# Altium PCB B_UN_C.PcbDoc
Units mm, origin at the board's own origin, x right, y up, seen from the top; angles counter-clockwise.
Board outline 110.11 x 90.04 mm, 2 copper layers (Top Layer, Bottom Layer); 66 components, 31 nets, 173 pads, 2 vias.
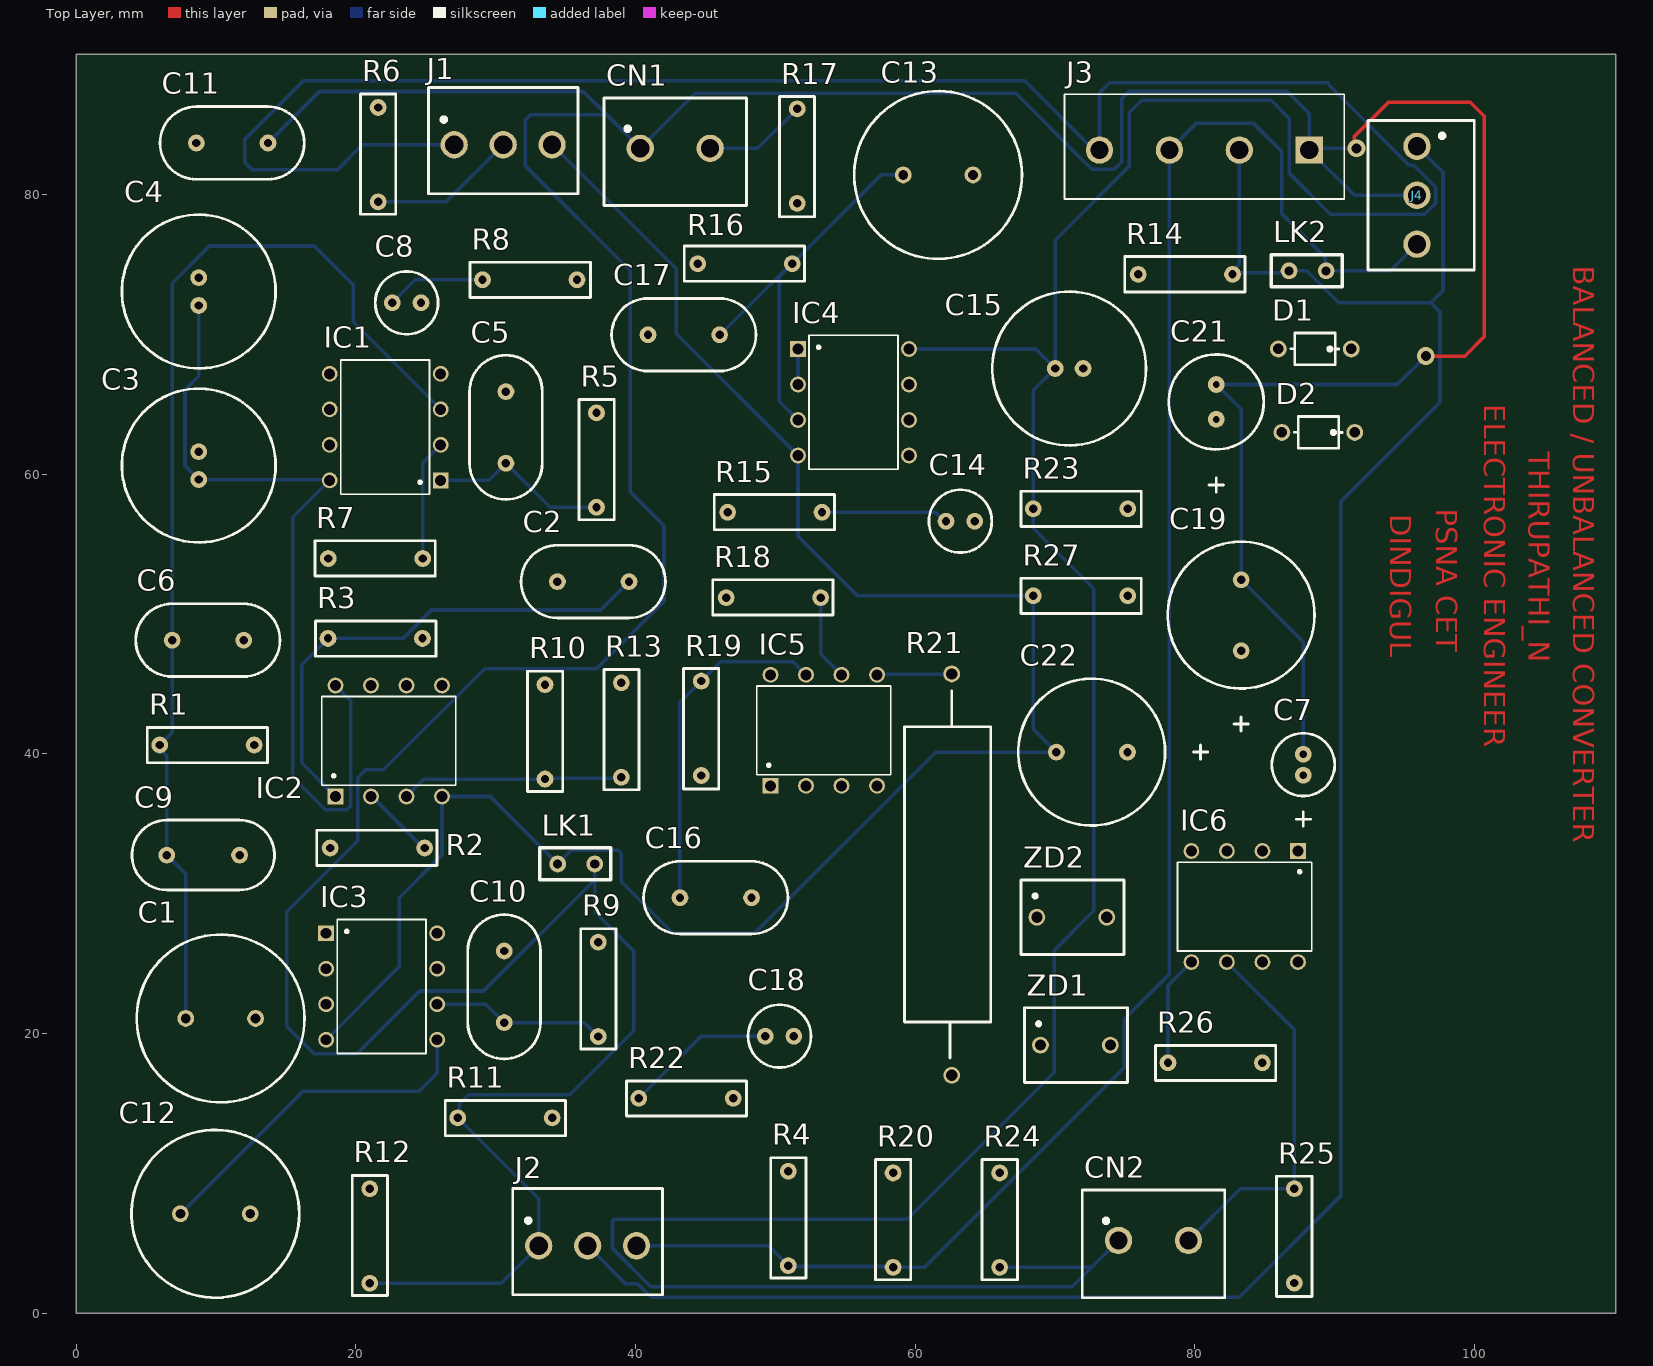
[diagram p0: Top Layer view]
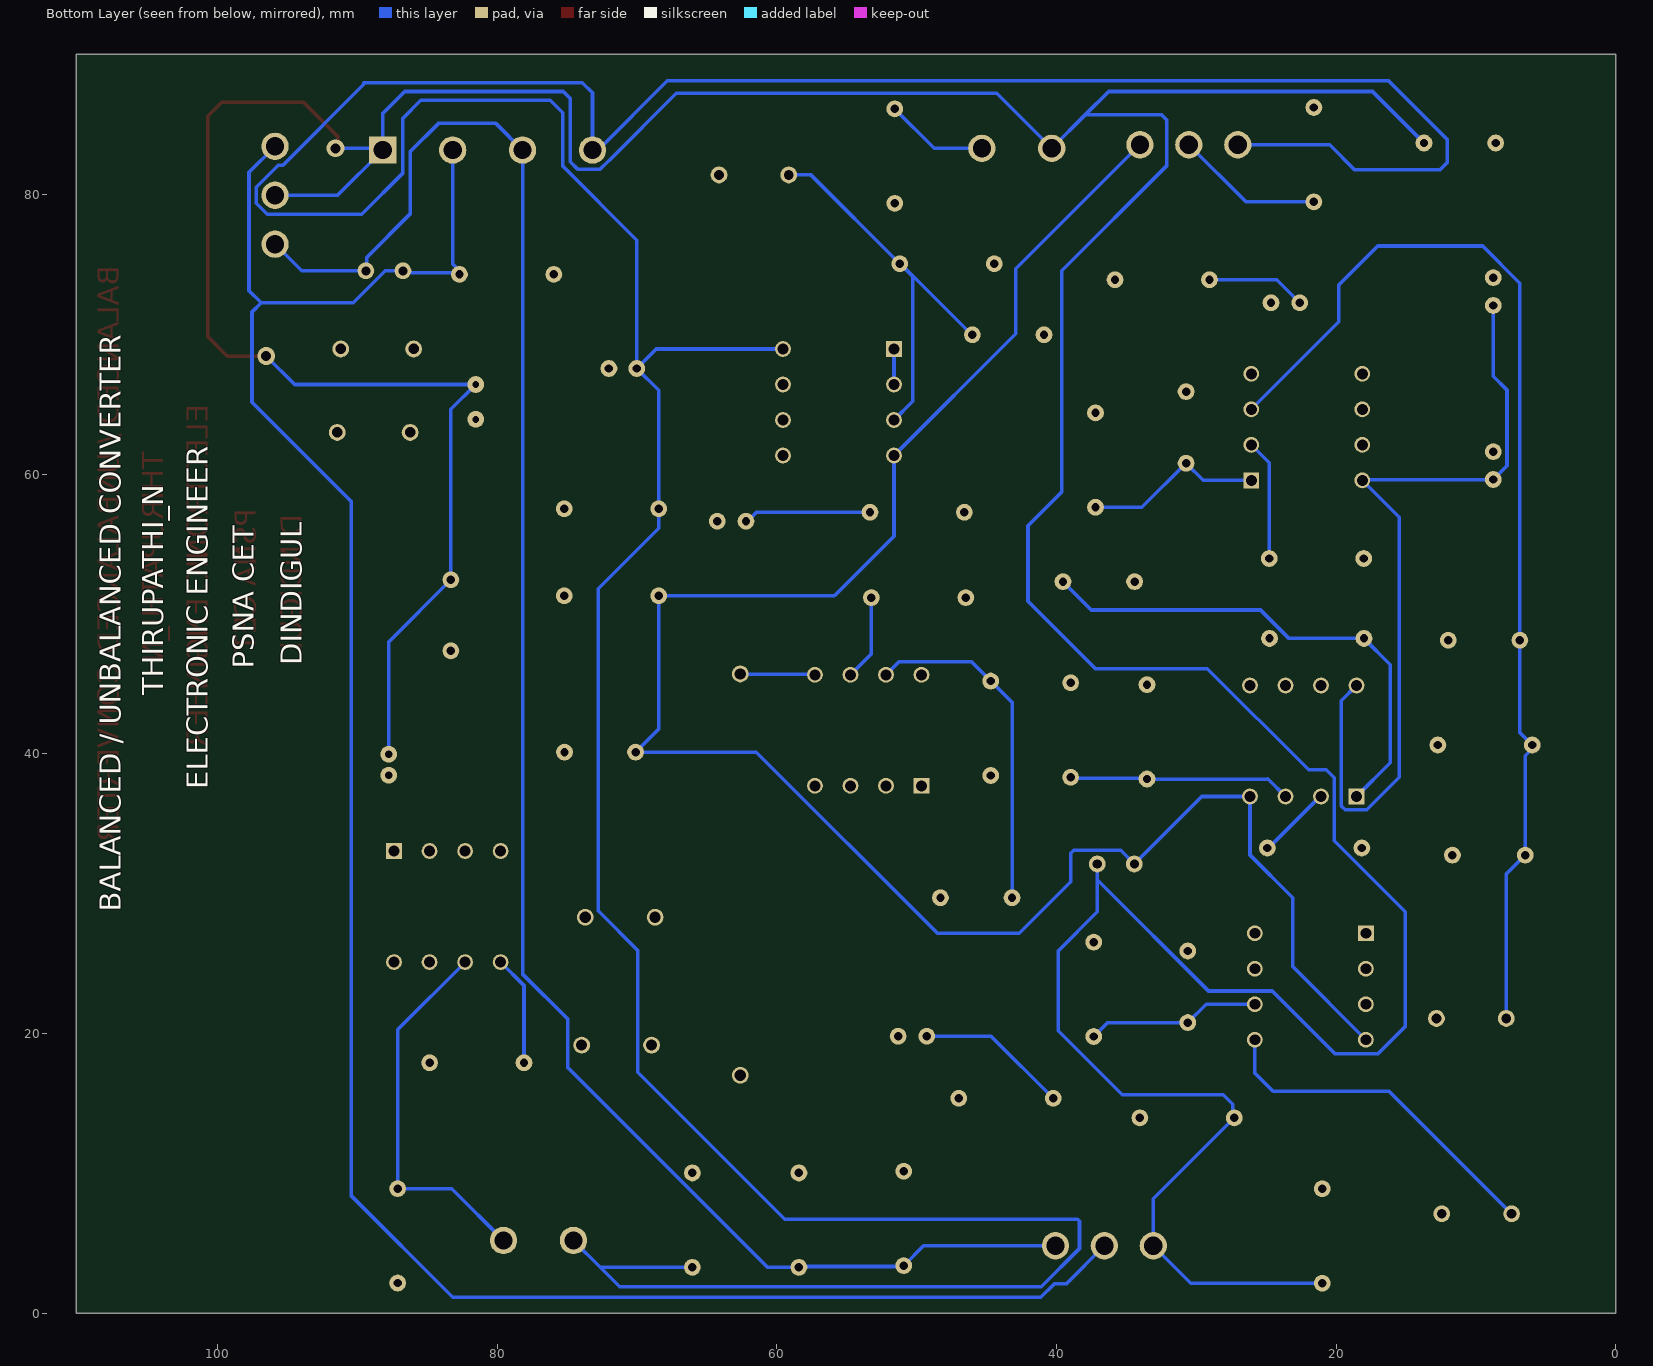
[diagram p1: Bottom Layer view, seen from below]

## Layer stack, top to bottom
Top Solder: solder mask 0.0102, Solder Resist, Dk 3.5
Top Layer: signal copper 0.0356
Dielectric 1: dielectric 0.32, FR-4, Dk 4.8
Bottom Layer: signal copper 0.0356
Bottom Solder: solder mask 0.0102, Solder Resist, Dk 3.5

## Board outline
0,0 0,90.043 110.109,90.043 110.109,0

## Design rules (kind name [scope] priority, off if disabled: settings)
Clearance [All] p1: gap=0.254 ignorepadtopadclearanceinfootprint=FALSE except(0: Arc-Hole Track-Hole SMDPad-Hole THPad-Hole Via-Hole Fill-Hole Poly-Hole Region-Hole Text-Hole)
MinimumSolderMaskSliver [All] p1: minsoldermaskwidth=0.096
PolygonConnect [All] p1: connectstyle=Relief reliefconductorwidth=0.254 reliefentries=4 polygonreliefangle="90 Angle" airgapwidth=0.254
RoutingVias [All] p1: holewidth=0.711 width=1.27 viastyle="Through Hole" minholewidth=0.711 minwidth=1.27 maxholewidth=0.711 maxwidth=1.27
SilkToSolderMaskClearance [IsPad] p1: minsilkscreentomaskgap=0.15 clearancetoexposedcopper=TRUE
SolderMaskExpansion [All] p1: expansion=0.102 istentingtop=FALSE
Width [All] p1: maxlimit=0.254 minlimit=0.254 preferedwidth=0.254
28 further rules are at their usual default settings.

## Components (designator, comment, footprint, x,y, rotation, side; value= is the part's Value field where it differs from the comment)
C1 "C_10uF" C_10UF 7.835,21.082 r0 top
C2 "C_100pF" C_100PF 39.537,52.324 r180 top
C3 "C_100nF" C_100NF 8.763,59.628 r90 top
C4 "C_100nF" C_100NF 8.763,72.074 r90 top
C5 "C_100pF" C_100PF 30.734,60.793 r90 top
C6 "C_100pF" C_100PF 6.858,48.133 r0 top
C7 "C_10uF_16V" C_10UF_16V 87.757,39.981 r270 top
C8 "C_22uF" C_22UF 22.733,72.263 r0 top
C9 "C_220pF" C_220PF 6.484,32.766 r0 top
C10 "C_100pF" C_100PF 30.607,20.788 r90 top
C11 "C_100pF" C_100PF 13.716,83.693 r180 top
C12 "C_10uF" C_10UF 7.454,7.112 r0 top
C13 "C_10uF" C_10UF 59.143,81.407 r0 top
C14 "C_22uF" C_22UF 62.335,56.642 r0 top
C15 "C_100nF" C_100NF 70.017,67.564 r0 top
C16 "C_100pF" C_100PF 43.18,29.718 r0 top
C17 "C_100pF" C_100PF 46.014,69.977 r180 top
C18 "C_22uF" C_22UF 49.403,19.812 r0 top
C19 "C_470uF_25V" C_25V_470UF 83.312,51.181 r270 top
C21 "C_100uF_16V" C_100UF_16V 81.534,66.421 r270 top
C22 "C_470uF_25V" C_25V_470UF 71.374,40.132 r0 top
CN1 "1 x 2_CON" 1*2_CONNECTOR 40.299,83.312 r0 top
CN2 "1 x 2_CON" 1*2_CONNECTOR 74.509,5.207 r0 top
D1 "D_1N4004" D_IN4004 91.189,68.961 r180 top
D2 "D_1N4004" D_IN4004 91.44,62.992 r180 top
IC1 "LM833P" IC_833 22.225,59.563 r180 top
IC2 "LM833P" IC_833 18.542,40.8 r90 top
IC3 "LM833P" IC_833 21.717,27.178 r0 top
IC4 "LM833P" IC_833 55.466,68.961 r0 top
IC5 "LM833P" IC_833 49.657,41.562 r90 top
IC6 "LM833P" IC_833 87.376,29.21 r270 top
J1 "1x3" 1*3_CONNECTOR 27.036,83.566 r0 top
J2 "1x3" 1*3_CONNECTOR 33.076,4.826 r0 top
J3 "1x4" 1*4_CONNECTOR 88.185,83.185 r180 top
J4 "1x3" 1*3_CONNECTOR 95.885,83.454 r270 top
LK1 "2__PINS" 2_PIN 34.434,32.131 r0 top
LK2 "2__PINS" 2_PIN 86.741,74.549 r0 top
R1 "R_10K" CF_RESISTOR_FP 6.096,40.64 r0 top
R2 "R_10K" CF_RESISTOR_FP 24.788,33.274 r180 top
R3 "R_10K" CF_RESISTOR_FP 18.138,48.26 r0 top
R4 "R_100K" CF_RESISTOR_FP 50.927,3.533 r90 top
R5 "R_10K" CF_RESISTOR_FP 37.211,57.762 r90 top
R6 "R_150" CF_RESISTOR_FP 21.59,79.606 r90 top
R7 "R_20K" CF_RESISTOR_FP 24.661,53.975 r180 top
R8 "R_100K" CF_RESISTOR_FP 29.187,73.914 r0 top
R9 "R_10K" CF_RESISTOR_FP 37.338,19.916 r90 top
R10 "R_10K" CF_RESISTOR_FP 33.528,38.331 r90 top
R11 "R_10K" CF_RESISTOR_FP 27.409,13.97 r0 top
R12 "R_100K" CF_RESISTOR_FP 20.995,2.275 r90 top
R13 "R_10K" CF_RESISTOR_FP 38.989,38.458 r90 top
R14 "R_150" CF_RESISTOR_FP 82.573,74.295 r180 top
R15 "R_100K" CF_RESISTOR_FP 53.213,57.277 r180 top
R16 "R_10K" CF_RESISTOR_FP 51.077,75.057 r180 top
R17 "R_100K" CF_RESISTOR_FP 51.562,86.002 r270 top
R18 "R_10K" CF_RESISTOR_FP 53.109,51.181 r180 top
R19 "R_10K" CF_RESISTOR_FP 44.704,45.085 r270 top
R20 "R_150" CF_RESISTOR_FP 58.42,3.406 r90 top
R21 "R_4.7K" R_4.7K 62.611,45.72 r270 top
R22 "R_100K" CF_RESISTOR_FP 40.363,15.367 r0 top
R23 "R_33" CF_RESISTOR_FP 68.58,57.531 r0 top
R24 "R_10K" CF_RESISTOR_FP 66.04,3.406 r90 top
R25 "R_150" CF_RESISTOR_FP 87.122,8.786 r270 top
R26 "R_10K" CF_RESISTOR_FP 78.209,17.907 r0 top
R27 "R_33" CF_RESISTOR_FP 68.58,51.308 r0 top
ZD1 "ZD_15V_1W" ZR_15V_1W 68.961,19.177 r0 top
ZD2 "ZD_15V_1W" ZR_15V_1W 68.707,28.321 r0 top

## Footprints (in the part's own frame and the unit in brackets; to place one, negate y for a bottom-side part, rotate by r counter-clockwise, add the part's x,y. Pads: shape width x height; smd on the part's side, far side on the other; paste and mask are expansions set on the pad)
1*2_CONNECTOR [mm]
  round 1.95 hole 1.3: 1(0.04,0) 2(5.04,0)
  silkscreen extent -2.56,-4.1 7.64,3.6, body extent -2.49,-4.11 7.51,3.39, height 12
1*3_CONNECTOR [mm]
  round 1.95 hole 1.3: 1(0,0) 2(3.5,0) 3(7,0)
  silkscreen extent -1.85,-3.5 8.85,4.1, body extent -2.09,-3.45 8.81,3.95, height 8.7
1*4_CONNECTOR [mm]
  rect 1.95x1.95 hole 1.3: 1(0,0)
  round 1.95 hole 1.3: 2(5,0) 3(10,0) 4(15,0)
  silkscreen extent -2.5,-4 17.5,3.5, body extent -2.51,-3.94 17.49,3.56, height 11.61
2_PIN [mm]
  round 1.2 hole 0.65: 1(0,0) 2(2.65,0)
  silkscreen extent -1.27,-1.14 3.81,1.14
C_10UF [mm]
  round 1.2 hole 0.7: 1(0,0) 2(4.992,0)
  silkscreen extent -3.5,-6 8.5,6, body extent -2.51,-5 7.51,5, height 19.75
C_10UF_16V [mm]
  round 1.2 hole 0.55: 1(0,0) 2(1.5,0)
  silkscreen extent -1.5,-2.25 5.16,2.25, body extent -1.24,-1.99 2.75,1.99, height 8.02
C_22UF [mm]
  round 1.2 hole 0.6: 1(-0.127,0) 2(1.927,0)
  silkscreen extent -1.35,-2.25 3.15,2.25, body extent -1.63,-2.48 3.39,2.52, height 12.71
C_25V_470UF [mm]
  round 1.2 hole 0.6: 1(-1.27,0) 2(3.81,0)
  silkscreen extent -4,-5.25 9.55,5.25, body extent -3.75,-4.97 6.27,5.04, height 17.52
C_100NF [mm]
  round 1.2 hole 0.6: 1(0,0) 2(1.992,0)
  silkscreen extent -4.5,-5.5 6.5,5.5, body extent -1.55,-2.51 3.47,2.49, height 12.51
C_100PF [mm]
  round 1.2 hole 0.6: 1(0,0) 2(5.12,0)
  silkscreen extent -2.6,-2.6 7.72,2.6
C_100UF_16V [mm]
  round 1.2 hole 0.5: 1(0,0) 2(2.492,0)
  silkscreen extent -2.15,-3.4 7.69,3.4, body extent -2.13,-3.41 4.67,3.4, height 8.76
C_220PF [mm]
  round 1.2 hole 0.6: 1(0,0) 2(5.2,0)
  silkscreen extent -2.5,-2.5 7.7,2.5
CF_RESISTOR_FP [mm]
  round 1.2 hole 0.6: 1(-0.127,0) 2(6.627,0)
  silkscreen extent -1.02,-1.27 7.58,1.25
D_IN4004 [mm]
  round 1.2 hole 0.75: A(0,0) K(5.21,0)
  silkscreen extent 0.89,-1.14 4.3,1.12
IC_833 [mm]
  rect 1.13x1.13 hole 0.78: 1(-3.843,0)
  round 1.13 hole 0.78: 2(-3.843,-2.54) 3(-3.843,-5.08) 4(-3.843,-7.62) 5(4.097,-7.62) 6(4.097,-5.08) 7(4.097,-2.54) 8(4.097,0)
  silkscreen extent -3.05,-8.6 3.3,0.98, body extent -3.68,-8.6 4.19,0.98, height 5.58
R_4.7K [mm]
  round 1.2 hole 0.8: 1(0,0) 2(28.702,0)
  silkscreen extent 1.2,-3.37 27.47,2.79, body extent -0.39,-2.36 29.1,2.1, height 4.47
ZR_15V_1W [mm]
  round 1.2 hole 0.8: A(0,0) K(5,0)
  silkscreen extent -1.14,-2.67 6.22,2.67

## Part data
C1 C12 C13: "CAP ALUM 10UF 20% 400V RADIAL", Capacitance=10uF, Case/Package=Radial, Manufacturer=Nichicon, Manufacturer Part Number=UCA2G100MPD1TD, Max Operating Temperature=105°C, Min Operating Temperature=-25°C, Package Quantity=500, Ripple Current=280mA, Supplier Part Number 1=493-4771-1-ND, Tolerance=20%, Voltage Rating=400V, Category="Aluminum Electrolytic Capacitors", ComponentLink1Description=https://datasheet.ciiva.com/6299/e-ca-6299384.pdf?src-supplier=Digi-Key, ComponentLink1URL=https://datasheet.ciiva.com/6299/e-ca-6299384.pdf?src-supplier=Digi-Key, Height - Seated (Max)=0.846inch, Lead Diameter=0.6mm, Lead Free="Lead Free", Lead Pitch=0.197inch, Life (Hours)=10000Hour, Mount="Through Hole", Packaging="Tape and Reel", Pricing 1="1=0.81000, 10=0.60000, 50=0.48020, 100=0.41150 (USD)", RoHS=Yes, RoHS Compliant=Yes, Series=CA, Stock 1=4242, Supplier 1=Digi-Key, Termination=Radial, Voltage Rating (DC)=400V
C2 C5 C6 C10 C11 C16 C17: "CAPACITOR CERAMIC 100PF 3000V C0G 5%, RAD", Capacitance=100pF, Case/Package=Radial, Dielectric=C0G, Manufacturer=KEMET, Manufacturer Part Number=C330C101JHG5TA, Max Operating Temperature=125°C, Min Operating Temperature=-55°C, Package Quantity=250, Supplier Part Number 1=399-5096-ND, Temperature Coefficient=30ppm/°C, Tolerance=5%, Voltage Rating=3kV, Category="Ceramic Capacitors", ComponentLink1Description=https://datasheet.ciiva.com/203/f3101-goldmax-203490.pdf?src-supplier=Digi-Key, ComponentLink1URL=https://datasheet.ciiva.com/203/f3101-goldmax-203490.pdf?src-supplier=Digi-Key, ComponentLink2Description=https://datasheet.ciiva.com/28645/706880-28645882.pdf?src-supplier=Element14, ComponentLink2URL=https://datasheet.ciiva.com/28645/706880-28645882.pdf?src-supplier=Element14, ComponentLink3Description=https://datasheet.ciiva.com/41659/f3101-goldmax-41659614.pdf?src-supplier=Farnell, ComponentLink3URL=https://datasheet.ciiva.com/41659/f3101-goldmax-41659614.pdf?src-supplier=Farnell, Depth=6.35mm, Dissipation Factor=0.1%, Height=3.81mm, Height - Seated (Max)=0.36inch, Lead Diameter=0.51mm, Lead Free="Lead Free", Lead Length=7mm, Lead Pitch=5.08mm, Lead/Base Style=Straight, Length=7.62mm, Mount="Through Hole", Number of Pins=2, Packaging=Bulk, Pitch=5.08mm, Pricing 1="1=2.77000, 10=2.23700, 50=1.95200, 100=1.70800, 500=1.30134, 1000=1.13868, 2500=1.09801, 5000=1.05734 (USD)", Radiation Hardening=No, REACH SVHC="No SVHC", RoHS=Yes, RoHS Compliant=Yes, Stock 1=2092, Supplier 1=Digi-Key, Termination=Radial, Voltage Rating (DC)=3kV, Width=7.62mm
C3 C4 C15: "NICHICON   UVR2A0R1MDD1TD   ALUMINUM ELECTROLYTIC CAPACITOR, 0.1UF, 100V, 20%, RADIAL", Capacitance=100nF, Case/Package=Radial, Dielectric Material=Aluminium, Manufacturer=Nichicon, Manufacturer Part Number=UVR2A0R1MDD1TD, Max Operating Temperature=85°C, Min Operating Temperature=-40°C, Package Quantity=1, Ripple Current=2.1mA, Supplier Part Number 1=493-12812-1-ND, Tolerance=20%, Voltage Rating=100V, Category="Aluminum Electrolytic Capacitors", ComponentLink1Description=https://datasheet.ciiva.com/7907/e-vr-7907512.pdf?src-supplier=Element14, ComponentLink1URL=https://datasheet.ciiva.com/7907/e-vr-7907512.pdf?src-supplier=Element14, ComponentLink2Description=https://datasheet.ciiva.com/29544/e-vr-29544649.pdf?src-supplier=Digi-Key, ComponentLink2URL=https://datasheet.ciiva.com/29544/e-vr-29544649.pdf?src-supplier=Digi-Key, Diameter=5mm, Height=11mm, Height - Seated (Max)=0.492inch, Lead Pitch=0.079inch, Life (Hours)=2000Hour, Mount="Through Hole", Number of Pins=2, Packaging="Tape and Reel", Pricing 1="1=0.29000, 10=0.20000, 50=0.12000, 100=0.10140, 500=0.06936, 1000=0.06136 (USD)", REACH SVHC="No SVHC", RoHS=Yes, RoHS Compliant=Yes, Series=VR, Stock 1=5234, Supplier 1=Digi-Key, Termination=Radial, Voltage Rating (DC)=100V
C7: "CAPACITOR ALUM ELECT, 10UF, 16V, 20%, RADIAL", Capacitance=10uF, Case/Package=Radial, Leakage Current=3uA, Manufacturer=Nichicon, Manufacturer Part Number=UST1C100MDD1TE, Max Operating Temperature=105°C, Min Operating Temperature=-55°C, Package Quantity=1, Ripple Current=29mA, Supplier Part Number 1=493-14735-1-ND, Tolerance=20%, Voltage Rating=16V, Category="Aluminum Electrolytic Capacitors", ComponentLink1Description=https://datasheet.ciiva.com/6314/e-st-6314645.pdf?src-supplier=Digi-Key, ComponentLink1URL=https://datasheet.ciiva.com/6314/e-st-6314645.pdf?src-supplier=Digi-Key, Diameter=4mm, Dissipation Factor=0.18%, Height=7mm, Height - Seated (Max)=0.315inch, Lead Pitch=0.059inch, Length=7mm, Life (Hours)=1000Hour, Mount="Through Hole", Packaging="Tape and Reel", Pricing 1="1=0.25000, 10=0.17300, 50=0.11540, 100=0.09810, 500=0.06928, 1000=0.06062 (USD)", RoHS=Yes, RoHS Compliant=Yes, Series="PML CAP, ST", Stock 1=4188, Supplier 1=Digi-Key, Termination=Radial, Voltage Rating (DC)=16V
C8 C14 C18: "Cap Aluminum Lytic 22uF 50V 20% (5 X 11mm) Radial 2.5mm 95mA 2000h 85C Ammo Pack", Capacitance=22uF, Case/Package=Radial, Dielectric Material=Aluminium, Leakage Current=33uA, Manufacturer=Nichicon, Manufacturer Part Number=UVR1H220MDD1TD, Max Operating Temperature=85°C, Min Operating Temperature=-40°C, Package Quantity=1, Ripple Current=95mA, Supplier Part Number 1=493-6098-1-ND, Tolerance=20%, Voltage=50V, Category="Aluminum Electrolytic Capacitors", ComponentLink1Description=https://datasheet.ciiva.com/16512/e-vr-16512886.pdf?src-supplier=Future+Electronics, ComponentLink1URL=https://datasheet.ciiva.com/16512/e-vr-16512886.pdf?src-supplier=Future+Electronics, ComponentLink2Description=https://datasheet.ciiva.com/5330/e-vr-6088-5330936.pdf?src-supplier=Mouser, ComponentLink2URL=https://datasheet.ciiva.com/5330/e-vr-6088-5330936.pdf?src-supplier=Mouser, ComponentLink3Description=https://datasheet.ciiva.com/7781/e-vr-7781742.pdf?src-supplier=Element14, ComponentLink3URL=https://datasheet.ciiva.com/7781/e-vr-7781742.pdf?src-supplier=Element14, ComponentLink4Description=https://datasheet.ciiva.com/6298/e-vr-6298255.pdf?src-supplier=Digi-Key, ComponentLink4URL=https://datasheet.ciiva.com/6298/e-vr-6298255.pdf?src-supplier=Digi-Key, Construction=RADIAL, Contact Plating=Tin,Matte, Diameter=5mm, Dissipation Factor=0.12%, Features="General Purpose", Height=11mm, Height - Seated (Max)=0.492inch, Lead Diameter=0.5mm, Lead Free="Lead Free", Lead Pitch=2mm, Length=11mm, Life (Hours)=2000Hour, Mount="Through Hole,PCB", Packaging="Tape and Reel", Pricing 1="1=0.29000, 10=0.20000, 50=0.12000, 100=0.10140, 500=0.06936, 1000=0.06136 (USD)", Radiation Hardening=No, REACH SVHC="No SVHC", RoHS=Yes, RoHS Compliant=Yes, Series=VR, Stock 1=2541, Supplier 1=Digi-Key, Termination=Radial, Voltage Rating=50V, Voltage Rating (DC)=50V
C9: "VISHAY         F221K25Y5RN6UK5R             Ceramic Disc & Plate Capacitor, 220 pF, 1 kV, F Series,  10%, Radial Leaded, Y5R", Capacitance=220pF, Case/Package=Radial, Dielectric=Y5R, Dielectric Material=Ceramic, Insulation Resistance=10GR, Manufacturer="Vishay BCcomponents", Manufacturer Part Number=F221K25Y5RN6UK5R, Max Operating Temperature=125°C, Min Operating Temperature=-30°C, Package Quantity=2000, Supplier Part Number 1=BC5218CT-ND, Tolerance=10%, Voltage=1kV, Category="Ceramic Capacitors", ComponentLink1Description=https://datasheet.ciiva.com/11789/0900766b80d81bfa-11789705.pdf?src-supplier=RSComponents, ComponentLink1URL=https://datasheet.ciiva.com/11789/0900766b80d81bfa-11789705.pdf?src-supplier=RSComponents, ComponentLink2Description=https://datasheet.ciiva.com/15165/getdatasheetpartid-691058-15165003.pdf?src-supplier=Verical, ComponentLink2URL=https://datasheet.ciiva.com/15165/getdatasheetpartid-691058-15165003.pdf?src-supplier=Verical, ComponentLink3Description=https://datasheet.ciiva.com/182/hvldf02-182150.pdf?src-supplier=Digi-Key, ComponentLink3URL=https://datasheet.ciiva.com/182/hvldf02-182150.pdf?src-supplier=Digi-Key, ComponentLink4Description=https://datasheet.ciiva.com/11461/hvldf02-11461596.pdf?src-supplier=Avnet, ComponentLink4URL=https://datasheet.ciiva.com/11461/hvldf02-11461596.pdf?src-supplier=Avnet, ComponentLink5Description=https://datasheet.ciiva.com/16695/hvldf02-16695021.pdf?src-supplier=Avnet+Europe, ComponentLink5URL=https://datasheet.ciiva.com/16695/hvldf02-16695021.pdf?src-supplier=Avnet+Europe, ComponentLink6Description=https://datasheet.ciiva.com/7974/1522849-7974607.pdf?src-supplier=Element14, ComponentLink6URL=https://datasheet.ciiva.com/7974/1522849-7974607.pdf?src-supplier=Element14, Construction=RADIAL, Depth=4.5mm, Lead Diameter=0.6mm, Lead Pitch=5mm, Lead/Base Style=Kinked, Length=6.5mm, Mount="Through Hole", Packaging="Tape and Reel", Pricing 1="1=0.26000, 10=0.18000, 50=0.11960, 100=0.10170, 500=0.07180, 1000=0.06283 (USD)", Radiation Hardening=No, REACH SVHC=Unknown, Resistor Type=Ceramic, RoHS=Yes, RoHS Compliant=Yes, Series=F, Stock 1=17892, Supplier 1=Digi-Key, Termination=Radial, Voltage Rating=1kV
C19 C22: "NICHICON         UHE1E471MPD6TD            ALUMINUM ELECTROLYTIC CAPACITOR, 470UF, 25V, 20%, RADIAL", Capacitance=470uF, Case/Package=Radial, Dielectric Material=Aluminium, ESR (Equivalent Series Resistance)=240mR, Manufacturer=Nichicon, Manufacturer Part Number=UHE1E471MPD6TD, Max Operating Temperature=105°C, Min Operating Temperature=-40°C, Package Quantity=500, Ripple Current=1.21A, Supplier Part Number 1=493-15240-1-ND, Tolerance=20%, Voltage Rating=25V, Category="Aluminum Electrolytic Capacitors", ComponentLink1Description=https://datasheet.ciiva.com/17520/e-he-17520934.pdf?src-supplier=Avnet+Europe, ComponentLink1URL=https://datasheet.ciiva.com/17520/e-he-17520934.pdf?src-supplier=Avnet+Europe, ComponentLink2Description=https://datasheet.ciiva.com/7851/e-he-7851630.pdf?src-supplier=Element14, ComponentLink2URL=https://datasheet.ciiva.com/7851/e-he-7851630.pdf?src-supplier=Element14, Diameter=10mm, Dissipation Factor=0.14%, Height=16mm, Height - Seated (Max)=0.688inch, Impedance=60mR, Lead Diameter=0.6mm, Lead Free="Lead Free", Lead Pitch=5mm, Length=16mm, Life (Hours)=7000Hour, Mount="Through Hole", Number of Pins=2, Packaging="Tape and Reel", Polarity=Polar, Pricing 1="1=0.70000, 10=0.49200, 50=0.37180, 100=0.32390 (USD)", Radiation Hardening=No, REACH SVHC="No SVHC", RoHS=Yes, RoHS Compliant=Yes, Series=HE, Stock 1=3720, Supplier 1=Digi-Key, Termination=Radial, Voltage Rating (DC)=25V
C21: "Cap Aluminum Lytic 100uF 16V 20% (6.3 X 7mm) Radial 2.5mm 110mA 1000h 105°C Ammo", Capacitance=100uF, Case/Package=Aluminum, Manufacturer=KEMET, Manufacturer Part Number=ESS107M016AE2EA, Max Operating Temperature=105°C, Package Quantity=2000, Supplier Part Number 1=399-18280-1-ND, Tolerance=20%, Voltage Rating=16V, Category="Aluminum Electrolytic Capacitors", ComponentLink1Description=http://www.mouser.com/ds/2/212/KEM_A4057_ESS-1077971.pdf?src-supplier=Mouser, ComponentLink1URL=http://www.mouser.com/ds/2/212/KEM_A4057_ESS-1077971.pdf?src-supplier=Mouser, ComponentLink2Description=http://datasheet.octopart.com/ESS107M016AE2EA-KEMET-datasheet-141704041.pdf?src-supplier=Farnell, ComponentLink2URL=http://datasheet.octopart.com/ESS107M016AE2EA-KEMET-datasheet-141704041.pdf?src-supplier=Farnell, ComponentLink3Description=http://datasheet.octopart.com/ESS107M016AE2EA-KEMET-datasheet-102161911.pdf?src-supplier=Newark, ComponentLink3URL=http://datasheet.octopart.com/ESS107M016AE2EA-KEMET-datasheet-102161911.pdf?src-supplier=Newark, Lead Pitch=5mm, Length=7mm, Packaging="Ammo Pack", Pricing 1="1=0.22000, 10=0.14800, 50=0.08920, 100=0.07520, 500=0.05148, 1000=0.04554 (USD)", RoHS Compliant=Yes, Series=ESS, Stock 1=4956, Supplier 1=Digi-Key, Termination=Radial, Voltage Rating (DC)=16V
CN1 CN2: "TERM BLK 2POS SIDE ENTRY 5MM PCB", Color=Green, Current=16A, Manufacturer="Wurth Electronics", Manufacturer Part Number=691137710002, Max Operating Temperature=120°C, Min Operating Temperature=-30°C, Supplier Part Number 1=732-10955-ND, Voltage=300V, Category="Terminal Blocks", ComponentLink1Description=https://katalog.we-online.de/em/datasheet/691137710002.pdf?src-supplier=Digi-Key, ComponentLink1URL=https://katalog.we-online.de/em/datasheet/691137710002.pdf?src-supplier=Digi-Key, Housing Material=PC, Mount="Through Hole", Number of Levels=1, Number of Positions Per Level=2, Packaging=Bulk, Plating="Copper Alloy", Pricing 1="1=0.38000, 10=0.34000, 50=0.30000, 100=0.27000, 500=0.26000 (USD)", RoHS=No, Stock 1=8076, Supplier 1=Digi-Key, Termination=Screw, Wire Gauge (Max)=30AWG, Wire Gauge (Min)=12AWG
D1 D2: "DIODES INC. - 1N4004-T - Standard Recovery Diode, 400 V, 1 A, Single, 1 V, 30 A", Average Rectified Current=1A, Capacitance=15pF, Case/Package=DO-41, Forward Voltage=1V, Manufacturer=Diodes, Manufacturer Part Number=1N4004-T, Max Forward Surge Current (Ifsm)=30A, Max Operating Temperature=150°C, Max Repetitive Reverse Voltage (Vrrm)=400V, Max Reverse Current=5uA, Min Operating Temperature=-65°C, Package Quantity=5000, Supplier Part Number 1=1N4004DICT-ND, Category="Rectifier Diodes", ComponentLink1Description=https://datasheet.ciiva.com/1176/ds28002-1176810.pdf?src-supplier=Element14, ComponentLink1URL=https://datasheet.ciiva.com/1176/ds28002-1176810.pdf?src-supplier=Element14, ComponentLink2Description=https://datasheet.ciiva.com/15219/getdatasheetpartid-115928-15219542.pdf?src-supplier=Verical, ComponentLink2URL=https://datasheet.ciiva.com/15219/getdatasheetpartid-115928-15219542.pdf?src-supplier=Verical, ComponentLink3Description=https://datasheet.ciiva.com/25947/ds28002-25947016.pdf?src-supplier=Avnet+Europe, ComponentLink3URL=https://datasheet.ciiva.com/25947/ds28002-25947016.pdf?src-supplier=Avnet+Europe, ComponentLink4Description=https://datasheet.ciiva.com/3304/ds28002-3304198.pdf?src-supplier=Avnet, ComponentLink4URL=https://datasheet.ciiva.com/3304/ds28002-3304198.pdf?src-supplier=Avnet, Contact Plating=Tin, Current Rating=1A, Diameter=5.21mm, Forward Current=1A, Height=2.71mm, Lead Free="Lead Free", Length=4.7mm, Max Reverse Voltage (DC)=400V, Max Surge Current=30A, Number of Pins=2, Output Current=1A, Packaging="Tape and Reel", Peak Non-Repetitive Surge Current=30A, Polarity=Standard, Pricing 1="1=0.21000, 10=0.18800, 100=0.10220, 500=0.06292, 1000=0.04290, 2000=0.03647 (USD)", Radiation Hardening=No, REACH SVHC="No SVHC", Recovery Time=2us, Reverse Voltage (DC)=400V, RoHS=Yes, RoHS Compliant=Yes, Series=-, Stock 1=261573, Supplier 1=Digi-Key, Termination="Through Hole", Voltage Rating (DC)=400V, Weight=0.010582oz, Width=2.71mm
IC1 IC2 IC3 IC4 IC5 IC6: "OP Amp Dual GP 18V/36V 8-Pin PDIP Tube", Case/Package=PDIP, Input Bias Current=300nA, Input Offset Voltage (Vos)=150uV, Manufacturer="Texas Instruments", Max Dual Supply Voltage=18V, Max Operating Temperature=85°C, Max Power Dissipation=500mW, Max Supply Voltage=36V, Min Dual Supply Voltage=5V, Min Operating Temperature=-40°C, Min Supply Voltage=10V, Nominal Supply Current=2.05mA, Output Current per Channel=37mA, Package Quantity=50, Power Supply Rejection Ratio (PSRR)=80dB, Supplier Part Number 1=296-27907-5-ND, Voltage Gain=110dB, Bandwidth=16MHz, Category="Amplifiers - Op Amps, Buffer, Instrumentation", Common Mode Rejection Ratio=80dB, ComponentLink1Description=https://datasheet.ciiva.com/14151/lm833-eng-ds-14151125.pdf?src-supplier=Distrelec, ComponentLink1URL=https://datasheet.ciiva.com/14151/lm833-eng-ds-14151125.pdf?src-supplier=Distrelec, ComponentLink2Description=https://datasheet.ciiva.com/7738/1863608-7738599.pdf?src-supplier=Element14, ComponentLink2URL=https://datasheet.ciiva.com/7738/1863608-7738599.pdf?src-supplier=Element14, Contact Plating=Gold, Gain Bandwidth Product=16MHz, Height=4.57mm, Lead Free="Lead Free", Length=10.16mm, Manufacturer Part Number=LM833P, Mount="Through Hole", Number of Amplifiers=2, Number of Channels=2, Number of Circuits=2, Number of Elements=2, Number of Pins=8, Operating Supply Current=2.05mA, Operating Supply Voltage=18V, Packaging=Rail/Tube, Pricing 1="1=4.95000, 10=4.44500, 25=4.20240, 100=3.64210, 250=3.45528, 500=3.10042, 1000=2.94254 (USD)", Radiation Hardening=No, REACH SVHC="No SVHC", RoHS=Yes, RoHS Compliant=Yes, Slew Rate=7V/µs, Stock 1=1823, Supplier 1=Digi-Key, Unity Gain Bandwidth Product=16MHz, Width=6.6mm
J1 J2 J4: "Fixed Terminal Blocks WR-TBL SMT Model7097 3Pin 5mm Hztl", Color=Black, Current=6A, Flammability Rating="UL94 V-0", Manufacturer="Wurth Electronics Midcom", Manufacturer Part Number=691709710303, Max Operating Temperature=115°C, Min Operating Temperature=-40°C, Package Quantity=200, Supplier Part Number 1=1297-1109-1-ND, Voltage=300V, Category="Terminal Blocks", ComponentLink1Description=https://datasheet.ciiva.com/29677/6917097103xx-29677797.pdf?src-supplier=Digi-Key, ComponentLink1URL=https://datasheet.ciiva.com/29677/6917097103xx-29677797.pdf?src-supplier=Digi-Key, ComponentLink2Description=https://datasheet.ciiva.com/29677/6917097103xx-29677798.pdf?src-supplier=Digi-Key, ComponentLink2URL=https://datasheet.ciiva.com/29677/6917097103xx-29677798.pdf?src-supplier=Digi-Key, ComponentLink3Description=https://datasheet.ciiva.com/29677/6917097103xx-29677799.pdf?src-supplier=Digi-Key, ComponentLink3URL=https://datasheet.ciiva.com/29677/6917097103xx-29677799.pdf?src-supplier=Digi-Key, Connector Type=Screw, Contact Plating=Tin, Current Rating=6A, Housing Material=Nylon, Mount="Surface Mount", Number of Contacts=3, Number of Levels=1, Number of Positions=3, Number of Positions Per Level=3, Packaging="Tape and Reel", Pitch=0.197inch, Plating=Steel, Pricing 1="1=3.63000, 10=3.41600, 50=3.13600, 100=2.85600 (USD)", REACH SVHC=Unknown, RoHS=Yes, Stock 1=370, Supplier 1=Digi-Key, Termination=Screw, Voltage Rating=300V, Wire Gauge (Max)=30AWG, Wire Gauge (Min)=14AWG, Wire/Cable Gauge=30AWG
J3: "TERM BLK 4POS SIDE ENTRY 5MM PCB", Color=Green, Current=16A, Manufacturer="Wurth Electronics", Manufacturer Part Number=691137710004, Max Operating Temperature=120°C, Min Operating Temperature=-30°C, Supplier Part Number 1=732-10957-ND, Voltage=300V, Category="Terminal Blocks", ComponentLink1Description=https://katalog.we-online.de/em/datasheet/691137710004.pdf?src-supplier=Digi-Key, ComponentLink1URL=https://katalog.we-online.de/em/datasheet/691137710004.pdf?src-supplier=Digi-Key, Housing Material=PC, Mount="Through Hole", Number of Levels=1, Number of Positions Per Level=4, Packaging=Bulk, Plating="Copper Alloy", Pricing 1="1=0.72000, 10=0.63000, 50=0.57000, 100=0.51000, 500=0.48000 (USD)", RoHS=No, Stock 1=1602, Supplier 1=Digi-Key, Termination=Screw, Wire Gauge (Max)=30AWG, Wire Gauge (Min)=12AWG
LK1 LK2: "HARWIN - M20-9990246 - CONNECTOR, HEADER, 2 POSITION, 1ROW, 2.54MM", Case/Package=SIL, Color=Black, Contact Resistance=30mR, Current Rating=3A, Insulation Resistance=10GR, Manufacturer=Harwin, Manufacturer Part Number=M20-9990246, Max Operating Temperature=105°C, Min Operating Temperature=-40°C, Package Quantity=1000, Supplier Part Number 1=952-2262-ND, Voltage Rating (AC)=750V, Category="Headers and Wire Housings", ComponentLink1Description=https://datasheet.ciiva.com/8046/315376-8046930.pdf?src-supplier=Element14, ComponentLink1URL=https://datasheet.ciiva.com/8046/315376-8046930.pdf?src-supplier=Element14, ComponentLink2Description=https://datasheet.ciiva.com/11745/0900766b81034e61-11745755.pdf?src-supplier=RSComponents, ComponentLink2URL=https://datasheet.ciiva.com/11745/0900766b81034e61-11745755.pdf?src-supplier=RSComponents, ComponentLink3Description=https://datasheet.ciiva.com/22660/1830818-22660571.pdf?src-supplier=Element14, ComponentLink3URL=https://datasheet.ciiva.com/22660/1830818-22660571.pdf?src-supplier=Element14, ComponentLink4Description=https://datasheet.ciiva.com/6833/m20-999-6833368.pdf?src-supplier=Digi-Key, ComponentLink4URL=https://datasheet.ciiva.com/6833/m20-999-6833368.pdf?src-supplier=Digi-Key, ComponentLink5Description=https://datasheet.ciiva.com/26852/getdatasheetpartid-384170-26852203.pdf?src-supplier=Verical, ComponentLink5URL=https://datasheet.ciiva.com/26852/getdatasheetpartid-384170-26852203.pdf?src-supplier=Verical, Connector Type="Male Pin", Contact Material=Brass,Bronze, Contact Mating Length=0.24inch, Contact Plating=Tin, Depth=2.54mm, Gender=Male, Housing Color=Black, Housing Material=Nylon, Length=5.08mm, Max Current Rating=3A, Mount="Through Hole", Number of Contacts=2, Number of Positions=2, Number of Rows=1, Orientation=Straight, Packaging=Bulk, Pitch=2.54mm, Pricing 1="1=0.11000, 10=0.10400, 100=0.06440, 500=0.05332, 1000=0.04666, 5000=0.04000, 10000=0.03889 (USD)", Radiation Hardening=No, REACH SVHC="No SVHC", RoHS=Yes, Stock 1=149358, Supplier 1=Digi-Key, Termination=Solder
R1 R2 R3 R5 R9 R10 R11 R13 R16 R18 R19 R24 R26: "RES 10K OHM 1/4W 5% AXIAL", Case/Package=Conformal, Manufacturer="Stackpole Electronics", Manufacturer Part Number=CF14JT10K0, Max Operating Temperature=155°C, Max Power Dissipation=250mW, Min Operating Temperature=-55°C, Package Quantity=1, Resistance=10kR, Resistor Type="Carbon Film", Supplier Part Number 1=CF14JT10K0CT-ND, Temperature Coefficient=-500ppm/°C, Tolerance=5%, Category="Through-Hole Resistors", ComponentLink1Description=http://components.arrow.com/part/dataview/27619991S9848636N1174?src-supplier=Arrow+Electronics, ComponentLink1URL=http://components.arrow.com/part/dataview/27619991S9848636N1174?src-supplier=Arrow+Electronics, ComponentLink2Description=https://www.verical.com/server-webapp/html/getDatasheet?partID=367360&src-supplier=Verical, ComponentLink2URL=https://www.verical.com/server-webapp/html/getDatasheet?partID=367360&src-supplier=Verical, ComponentLink3Description=https://www.seielect.com/catalog/SEI-CF_CFM.pdf?src-supplier=Avnet, ComponentLink3URL=https://www.seielect.com/catalog/SEI-CF_CFM.pdf?src-supplier=Avnet, ComponentLink4Description=http://www.seielect.com/Catalog/SEI-CF_CFM.pdf?src-supplier=Future+Electronics, ComponentLink4URL=http://www.seielect.com/Catalog/SEI-CF_CFM.pdf?src-supplier=Future+Electronics, ComponentLink5Description=https://www.seielect.com/catalog/SEI-Packaging.pdf?src-supplier=Digi-Key, ComponentLink5URL=https://www.seielect.com/catalog/SEI-Packaging.pdf?src-supplier=Digi-Key, Construction=Cylindrical, Contact Plating=Tin,Matte, Diameter=2.3mm, Features="Flame Retardant Coating", Lead Free="Lead Free", Length=6.5mm, Military Standard=Not, Mount="Through Hole,Axial", Number of Terminations=2, Packaging="Tape and Reel", Power Rating=250mW, Pricing 1="1=0.10000, 10=0.03600, 25=0.02640, 50=0.02000, 100=0.01480, 250=0.01124, 500=0.00900, 1000=0.00662 (USD)", Radiation Hardening=No, RoHS=Yes, RoHS Compliant=Yes, Series=CF, Stock 1=1267420, Supplier 1=Digi-Key, Termination=Axial
R4 R8 R12 R15 R17 R22: "RES 100K OHM 1/4W 5% AXIAL", Case/Package=Conformal, Manufacturer="Stackpole Electronics", Manufacturer Part Number=CF14JT100K, Max Operating Temperature=155°C, Max Power Dissipation=250mW, Min Operating Temperature=-55°C, Package Quantity=1, Resistance=100kR, Resistor Type="Carbon Film", Supplier Part Number 1=CF14JT100KCT-ND, Temperature Coefficient=-850ppm/°C, Tolerance=5%, Category="Through-Hole Resistors", ComponentLink1Description=https://datasheet.ciiva.com/26835/getdatasheetpartid-362215-26835399.pdf?src-supplier=Verical, ComponentLink1URL=https://datasheet.ciiva.com/26835/getdatasheetpartid-362215-26835399.pdf?src-supplier=Verical, Construction=Cylindrical, Contact Plating=Tin,Matte, Diameter=2.3mm, Features="Flame Retardant Coating", Lead Free="Lead Free", Length=6.5mm, Military Standard=Not, Mount="Through Hole,Axial", Number of Terminations=2, Packaging="Tape and Reel", Power Rating=250mW, Pricing 1="1=0.10000, 10=0.03600, 25=0.02640, 50=0.02000, 100=0.01480, 250=0.01124, 500=0.00900, 1000=0.00662 (USD)", Radiation Hardening=No, RoHS=Yes, RoHS Compliant=Yes, Series=CF, Stock 1=666123, Supplier 1=Digi-Key, Termination=Axial
R6 R14 R20 R25: "Res Carbon Film 150 Ohm 5% 1/4W -400ppm/C to 0ppm/C Conformal AXL Thru-Hole T/R", Case/Package=Conformal, Manufacturer="Stackpole Electronics", Manufacturer Part Number=CF14JT150R, Max Operating Temperature=155°C, Max Power Dissipation=250mW, Min Operating Temperature=-55°C, Package Quantity=5000, Resistance=150R, Resistor Type="Carbon Film", Supplier Part Number 1=CF14JT150RCT-ND, Temperature Coefficient=-400ppm/°C, Tolerance=5%, Category="Through-Hole Resistors", ComponentLink1Description=http://www1.futureelectronics.com/doc/STACKPOLE%20ELECTRONICS/CF-1__4-150R-5%25-R.pdf?src-supplier=Future+Electronics, ComponentLink1URL=http://www1.futureelectronics.com/doc/STACKPOLE%20ELECTRONICS/CF-1__4-150R-5%25-R.pdf?src-supplier=Future+Electronics, ComponentLink2Description=https://www.seielect.com/Catalog/SEI-CF_CFM.pdf?src-supplier=Digi-Key, ComponentLink2URL=https://www.seielect.com/Catalog/SEI-CF_CFM.pdf?src-supplier=Digi-Key, ComponentLink3Description=https://www.seielect.com/catalog/SEI-Packaging.pdf?src-supplier=Digi-Key, ComponentLink3URL=https://www.seielect.com/catalog/SEI-Packaging.pdf?src-supplier=Digi-Key, ComponentLink4Description=https://www.verical.com/server-webapp/html/getDatasheet?partID=360907&src-supplier=Verical, ComponentLink4URL=https://www.verical.com/server-webapp/html/getDatasheet?partID=360907&src-supplier=Verical, ComponentLink5Description=https://www.seielect.com/catalog/SEI-CF_CFM.pdf?src-supplier=Avnet, ComponentLink5URL=https://www.seielect.com/catalog/SEI-CF_CFM.pdf?src-supplier=Avnet, ComponentLink6Description=https://www.seielect.com/catalog/SEI-CF_CFM.pdf?src-supplier=Avnet+Asia, ComponentLink6URL=https://www.seielect.com/catalog/SEI-CF_CFM.pdf?src-supplier=Avnet+Asia, ComponentLink7Description=http://components.arrow.com/part/dataview/44988609S3426981N1174?src-supplier=Arrow+Electronics, ComponentLink7URL=http://components.arrow.com/part/dataview/44988609S3426981N1174?src-supplier=Arrow+Electronics, Construction=Cylindrical, Contact Plating=Tin,Matte, Diameter=2.3mm, Features="Flame Retardant Coating", Lead Free="Lead Free", Length=6.5mm, Military Standard=Not, Mount="Through Hole,Axial", Number of Terminations=2, Packaging="Tape and Reel", Power Rating=250mW, Pricing 1="1=0.10000, 10=0.03600, 25=0.02640, 50=0.02000, 100=0.01480, 250=0.01124, 500=0.00900, 1000=0.00662 (USD)", Radiation Hardening=No, RoHS=Yes, RoHS Compliant=Yes, Series=CF, Stock 1=90352, Supplier 1=Digi-Key, Termination=Axial
R7: "RES 20K OHM 1/2W 5% AXIAL", Case/Package=Axial, Manufacturer="Stackpole Electronics", Manufacturer Part Number=CF12JT20K0, Max Operating Temperature=155°C, Max Power Dissipation=500mW, Min Operating Temperature=-55°C, Package Quantity=1, Resistance=20kR, Resistor Type="Carbon Film", Supplier Part Number 1=CF12JT20K0CT-ND, Temperature Coefficient=-500ppm/°C, Tolerance=5%, Category="Through-Hole Resistors", ComponentLink1Description=http://components.arrow.com/part/dataview/2806914S4483198N1174?src-supplier=Arrow+Electronics, ComponentLink1URL=http://components.arrow.com/part/dataview/2806914S4483198N1174?src-supplier=Arrow+Electronics, ComponentLink2Description=https://www.seielect.com/Catalog/SEI-CF_CFM.pdf?src-supplier=Digi-Key, ComponentLink2URL=https://www.seielect.com/Catalog/SEI-CF_CFM.pdf?src-supplier=Digi-Key, ComponentLink3Description=https://www.seielect.com/catalog/SEI-CF_CFM.pdf?src-supplier=Avnet, ComponentLink3URL=https://www.seielect.com/catalog/SEI-CF_CFM.pdf?src-supplier=Avnet, Contact Plating=Tin,Matte, Diameter=2.7mm, Features="Flame Retardant Coating", Lead Free="Lead Free", Length=0.335inch, Mount="Through Hole,Axial", Number of Terminations=2, Packaging="Tape and Reel", Pricing 1="1=0.10000, 10=0.06500, 25=0.04720, 50=0.03600, 100=0.02660, 250=0.02024, 500=0.01620, 1000=0.01192 (USD)", Radiation Hardening=No, RoHS=Yes, Stock 1=24212, Supplier 1=Digi-Key
R21: "RESISTOR, CERAMIC, 4.7KOHM, 2W, 10%; Product Range:OY Series; Resistance:4.7kohm; Power Rating:2W; Resistance Tolerance: 10%; Voltage Rating:400V; Resistor Case Style:Axial Leaded; Resistor Element Type:Ceramic ;RoHS Compliant: Yes", Case/Package=Axial, Manufacturer=Ohmite, Manufacturer Part Number=OY472KE, Max Operating Temperature=220°C, Max Power Dissipation=2W, Min Operating Temperature=-40°C, Package Quantity=50, Resistance=4.7kR, Resistance Tolerance=10%, Resistor Type=Ceramic, Supplier Part Number 1=OY472KE-ND, Temperature Coefficient=300ppm/°C, Voltage Rating=400V, Category="Through-Hole Resistors", ComponentLink1Description=https://datasheet.ciiva.com/7715/95960-7715573.pdf?src-supplier=Element14, ComponentLink1URL=https://datasheet.ciiva.com/7715/95960-7715573.pdf?src-supplier=Element14, ComponentLink2Description=https://datasheet.ciiva.com/2716/res-ox-oy-2716365.pdf?src-supplier=Digi-Key, ComponentLink2URL=https://datasheet.ciiva.com/2716/res-ox-oy-2716365.pdf?src-supplier=Digi-Key, ComponentLink3Description=https://datasheet.ciiva.com/15784/ox-oy-series-15784253.pdf?src-supplier=Onlinecomponents.com, ComponentLink3URL=https://datasheet.ciiva.com/15784/ox-oy-series-15784253.pdf?src-supplier=Onlinecomponents.com, Diameter=7mm, Features="Moisture Resistant", Lead Diameter=0.8mm, Lead Free="Lead Free", Lead Length=38mm, Length=0.748inch, Material=Ceramic, Mount="Through Hole", Number of Terminations=2, Packaging=Bulk, Power Rating=2W, Pricing 1="1=2.23000, 10=1.98000, 25=1.83600, 50=1.72800, 100=1.51200, 250=1.29600, 500=1.08000, 1000=0.95760 (USD)", REACH SVHC=Unknown, RoHS=Yes, RoHS Compliant=Yes, Series=OY, Stock 1=1750, Supplier 1=Digi-Key, Termination=Axial, Tolerance=10%, Voltage Rating (DC)=400V, Wire/Cable Diameter=0.031inch
R23 R27: "RES 33 OHM 1/2W 5% AXIAL", Case/Package=Conformal, Manufacturer="Stackpole Electronics", Manufacturer Part Number=CF12JT33R0, Max Operating Temperature=155°C, Max Power Dissipation=500mW, Min Operating Temperature=-55°C, Package Quantity=1, Resistance=33R, Resistor Type="Carbon Film", Supplier Part Number 1=CF12JT33R0CT-ND, Temperature Coefficient=-400ppm/°C, Tolerance=5%, Category="Through-Hole Resistors", ComponentLink1Description=http://components.arrow.com/part/dataview/53393118S46102N1174?src-supplier=Arrow+Electronics, ComponentLink1URL=http://components.arrow.com/part/dataview/53393118S46102N1174?src-supplier=Arrow+Electronics, ComponentLink2Description=https://www.seielect.com/Catalog/SEI-CF_CFM.pdf?src-supplier=Digi-Key, ComponentLink2URL=https://www.seielect.com/Catalog/SEI-CF_CFM.pdf?src-supplier=Digi-Key, ComponentLink3Description=https://www.seielect.com/catalog/SEI-CF_CFM.pdf?src-supplier=Avnet, ComponentLink3URL=https://www.seielect.com/catalog/SEI-CF_CFM.pdf?src-supplier=Avnet, Construction=Cylindrical, Contact Plating=Tin,Matte, Diameter=2.7mm, Features="Flame Retardant Coating", Length=8.5mm, Military Standard=Not, Mount="Through Hole,Axial", Number of Terminations=2, Packaging="Tape and Reel", Pricing 1="1=0.10000, 10=0.06500, 25=0.04720, 50=0.03600, 100=0.02660, 250=0.02024, 500=0.01620, 1000=0.01192 (USD)", Radiation Hardening=No, RoHS=Yes, RoHS Compliant=Yes, Series=CF, Stock 1=54416, Supplier 1=Digi-Key, Termination=Axial
ZD1 ZD2: "GLOVE, POLYAMIDE, L/FREE, PU, SIZE 6 - More Details", Case/Package=DO-41, Collector Emitter Breakdown Voltage=-65V, Forward Voltage=1V, Manufacturer="NXP Semiconductors", Manufacturer Part Number=BZV85-C15,113, Max Operating Temperature=200°C, Max Power Dissipation=1.3W, Max Reverse Current=50nA, Min Operating Temperature=-65°C, Package Quantity=5000, Supplier Part Number 1=1727-4979-1-ND, Test Current=15mA, Tolerance=5%, Transition Frequency=100MHz, Working Voltage=15V, Zener Voltage=14.7V, Category="Zener Diodes", ComponentLink1Description=https://datasheet.ciiva.com/891/bzv85-ser-891077.pdf?src-supplier=Digi-Key, ComponentLink1URL=https://datasheet.ciiva.com/891/bzv85-ser-891077.pdf?src-supplier=Digi-Key, ComponentLink2Description=https://datasheet.ciiva.com/8346/bzv85-ser-8346890.pdf?src-supplier=Avnet, ComponentLink2URL=https://datasheet.ciiva.com/8346/bzv85-ser-8346890.pdf?src-supplier=Avnet, ComponentLink3Description=https://datasheet.ciiva.com/16389/bzv85-16389479.pdf?src-supplier=Future+Electronics, ComponentLink3URL=https://datasheet.ciiva.com/16389/bzv85-16389479.pdf?src-supplier=Future+Electronics, ComponentLink4Description=https://datasheet.ciiva.com/17264/bzv85-ser-17264095.pdf?src-supplier=Avnet+Europe, ComponentLink4URL=https://datasheet.ciiva.com/17264/bzv85-ser-17264095.pdf?src-supplier=Avnet+Europe, ComponentLink5Description=https://datasheet.ciiva.com/8346/bzv85-ser-8346895.pdf?src-supplier=Avnet, ComponentLink5URL=https://datasheet.ciiva.com/8346/bzv85-ser-8346895.pdf?src-supplier=Avnet, ComponentLink6Description=https://datasheet.ciiva.com/16474/bzv85-ser-16474057.pdf?src-supplier=Avnet+Asia, ComponentLink6URL=https://datasheet.ciiva.com/16474/bzv85-ser-16474057.pdf?src-supplier=Avnet+Asia, ComponentLink7Description=https://datasheet.ciiva.com/46392/812952-46392438.pdf?src-supplier=Element14, ComponentLink7URL=https://datasheet.ciiva.com/46392/812952-46392438.pdf?src-supplier=Element14, Contact Plating=Tin, Element Configuration=Single, ESD Protection=No, Height=2.6mm, Impedance=15R, Lead Free="Lead Free", Length=4.8mm, Max Reverse Leakage Current=50nA, Mount="Through Hole", Number of Pins=2, Packaging="Tape and Reel", Polarity=PNP, Power Dissipation=1.3W, Pricing 1="1=0.27000, 10=0.22500, 100=0.11910, 500=0.07838, 1000=0.05330, 2000=0.04807 (USD)", Radiation Hardening=No, REACH SVHC="No SVHC", RoHS=Yes, RoHS Compliant=Yes, Stock 1=3969, Supplier 1=Digi-Key, Voltage Tolerance=5%, Weight=0.01lb, Width=2.6mm

## Via types
v1: diameter 1.27, hole 0.711, Top Layer to Bottom Layer, 2 vias

## Nets (pads, with @x,y where several pads share a name; then routed paths per layer and width w, separated by ;. In a path a pad name is that pad's centre, name@x,y a point inside that pad or via, vN(x,y) a via of type N, cw(c..) or ccw(c..) an arc to the next point about the centre after c; other vN are vias at no path point)
(+): J2.2 J3.2 J4.1 LK2.1 R14.1 | length 162.1
  Bottom Layer w0.254: J2.2 39.306,2.095 40.17,2.095 41.123,1.143 83.185,1.143 90.424,8.382 90.424,58.039 97.536,65.151 97.536,71.606 96.879,72.263 ; J3.2 83.185,75.036 82.7,74.551 82.7,74.422 R14.1 82.827,74.422 86.614,74.422 LK2.1 88.004,74.549 90.29,72.263 91.694,72.263 96.879,72.263 ; J4.1 97.749,81.59 97.749,73.133 96.879,72.263
(-): J2.3 J3.3 J4.3 LK2.2 R4.1 R20.1 | length 135.2
  Bottom Layer w0.254: J2.3 49.507,4.826 R4.1 50.99,3.343 58.356,3.343 R20.1 60.673,3.279 74.942,17.548 74.942,21.017 78.185,24.26 J3.3 80.09,85.09 84.201,85.09 86.233,83.058 86.233,78.613 89.316,75.53 89.316,74.624 LK2.2 93.98,74.549 J4.3
GND: C7.1 C11.1 C19.1 C21.1 CN1.1 J2.1 J3.1 J4.2 LK1.2 R11.1 R12.1 | length 352.4
  Top Layer w0.254: v1(91.567,83.312) 91.418,83.461 91.418,84.179 93.853,86.614 99.695,86.614 100.711,85.598 100.711,69.85 99.314,68.453 v1(96.52,68.453)
  Bottom Layer w0.254: C11.1 17.399,87.376 36.275,87.376 37.926,85.725 ; R12.1 30.398,2.148 J2.1 33.076,8.176 R11.1 27.397,14.085 27.397,14.951 28.067,15.621 35.306,15.621 39.878,20.193 39.878,25.908 37.084,28.702 37.084,30.998 ; LK1.2 37.084,30.998 ; C7.1@87.757,39.878 87.757,48.006 C19.1 83.312,64.643 C21.1 94.488,66.421 v1(96.52,68.453) ; v1(91.567,83.312) 88.312,83.312 J3.1 ; J4.2 91.416,79.954 J3.1 ; 37.084,30.998 29.13,23.044 24.563,23.044 20.061,18.542 17.018,18.542 15.056,20.504 15.056,28.702 20.136,33.782 20.136,38.297 20.701,38.862 21.971,38.862 29.21,46.101 37.211,46.101 42.037,50.927 42.037,56.325 39.624,58.737 39.624,74.549 32.131,82.042 32.131,85.344 32.512,85.725 37.926,85.725 ; 37.926,85.725 CN1.1 44.276,87.249 67.183,87.249 72.009,82.423 72.029,82.423 72.623,81.829 74.254,81.829 74.772,82.347 74.772,86.88 75.289,87.398 75.311,87.376 86.614,87.376 88.185,85.805 J3.1
NetC1_1: C1.1 C6.1 C9.1 IC1.3 R1.1 | length 80.4
  Bottom Layer w0.254: C1.1 7.835,31.415 C9.1 6.484,39.869 5.969,40.384 R1.1 6.858,41.529 C6.1 6.858,73.66 9.525,76.327 17.018,76.327 19.812,73.533 19.812,70.899 IC1.3
NetC2_0: IC2.2 R2.1 | length 5.4
  Bottom Layer w0.254: IC2.2 21.157,36.957 24.84,33.274 R2.1
NetC2_1: C2.1 IC2.1 R3.1 | length 36.3
  Bottom Layer w0.254: IC2.1 16.129,39.37 16.129,46.378 R3.1 23.378,48.26 25.41,50.292 37.505,50.292 C2.1
NetC3_1: C3.1 C4.1 IC1.8 IC2.8 | length 59.2
  Bottom Layer w0.254: C4.1 8.763,67.006 7.782,66.025 7.782,60.609 C3.1 8.795,59.595 18.096,59.595 IC1.8 15.494,56.929 15.494,38.336 17.819,36.011 19.361,36.011 19.628,36.278 19.628,43.811 IC2.8
NetC5_0: IC1.2 R7.1 | length 8.7
  Bottom Layer w0.254: R7.1 24.788,60.823 IC1.2
NetC5_1: C5.1 IC1.1 R5.1 | length 13
  Bottom Layer w0.254: IC1.1 29.504,59.563 C5.1 33.892,57.635 R5.1
NetC8_1: C8.1 R8.1 | length 7.1
  Bottom Layer w0.254: C8.1 24.257,73.914 R8.1
NetC9_0: C12.1 IC3.5 | length 24.9
  Bottom Layer w0.254: C12.1 16.217,15.875 24.511,15.875 25.814,17.178 IC3.5
NetC10_0: IC3.7
NetC10_1: C10.1 IC3.6 R9.1 | length 12.5
  Bottom Layer w0.254: IC3.6 29.297,22.098 C10.1 36.339,20.788 R9.1
NetC13_0: CN1.2 R17.1 | length 7.4
  Bottom Layer w0.254: CN1.2 48.745,83.312 R17.1
NetC13_1: C13.1 C17.1 IC4.3 R16.1 | length 30
  Bottom Layer w0.254: C17.1 46.069,69.977 51.149,75.057 R16.1 ; IC4.3 50.292,65.212 50.292,74.145 R16.1 ; C13.1 57.554,81.407 R16.1
NetC14_0: IC4.1 IC4.2 | length 2.5
  Bottom Layer w0.254: IC4.2 IC4.1
NetC14_1: C14.1 R15.1 | length 9.1
  Bottom Layer w0.254: R15.1 61.456,57.277 62.091,56.642 C14.1
NetC16_0: IC5.6 R18.1 | length 6.1
  Bottom Layer w0.254: R18.1 53.236,47.16 IC5.6
NetC16_1: C16.1 IC5.7 R19.1 | length 24.6
  Bottom Layer w0.254: C16.1 43.18,43.688 R19.1 46.097,46.605 51.251,46.605 IC5.7
NetC18_1: C18.1 R22.1 | length 10.9
  Bottom Layer w0.254: R22.1 44.681,19.812 C18.1
NetC21_0: IC6.5 R26.1 | length 7.9
  Bottom Layer w0.254: R26.1 78.082,23.439 IC6.5
NetD1_1: 
NetD2_2: 
NetIC2_3: IC2.3 R10.1 R13.1 | length 16
  Bottom Layer w0.254: IC2.3 24.892,38.227 24.915,38.204 R10.1 33.591,38.268 38.925,38.268 R13.1
NetIC5_5: IC5.5 R21.1 | length 5.4
  Bottom Layer w0.254: IC5.5 57.308,45.689 62.58,45.689 R21.1
NetIC6_7: IC6.7
NetJ1_2: J1.2 R6.1 | length 10.6
  Bottom Layer w0.254: R6.1 26.449,79.479 J1.2
NetZD1_2: 
V+: C15.1 CN2.1 IC4.8 J1.1 J3.4 R23.1 R24.1 | length 312.2
  Bottom Layer w0.254: J1.1 20.464,83.566 18.686,81.788 12.573,81.788 12.065,82.296 12.065,83.947 16.256,88.138 67.838,88.138 72.791,83.185 J3.4 73.185,87.282 73.914,88.011 89.535,88.011 89.535,87.886 95.323,82.098 95.659,82.098 97.241,80.516 97.241,79.392 96.447,78.598 89.69,78.598 86.741,81.547 86.741,85.471 85.471,86.741 76.2,86.741 75.311,85.852 75.311,82.042 70.017,76.748 C15.1 ; IC4.8 68.62,68.961 C15.1 ; R24.1 72.621,3.279 ; CN2.1 72.621,3.279 ; C15.1 68.453,66 R23.1 68.453,56.134 72.771,51.816 72.771,28.772 69.942,25.943 69.942,17.237 59.436,6.731 38.503,6.731 38.354,6.582 38.354,4.63 41.102,1.882 71.224,1.882 72.621,3.279
V-: C22.1 IC2.4 IC3.4 IC4.4 J1.3 LK1.1 R27.1 | length 141.9
  Bottom Layer w0.254: IC3.4 23.114,24.798 23.114,29.718 26.162,32.766 IC2.4 29.608,36.957 LK1.1 35.415,33.112 38.77,33.112 38.989,32.893 38.989,30.861 42.672,27.178 48.514,27.178 61.468,40.132 C22.1 68.453,41.783 R27.1 55.88,51.308 51.623,55.565 IC4.4 42.908,70.056 42.908,74.694 J1.3
Vcc/2: CN2.2 IC6.6 R25.1 | length 27.3
  Bottom Layer w0.254: CN2.2 83.255,8.913 R25.1 87.122,20.287 IC6.6
pads on no net: C1.2 C2.2 C3.2 C4.2 C5.2 C6.2 C7.2 C8.2 C9.2 C10.2 C11.2 C12.2 C13.2 C14.2 C15.2 C16.2 C17.2 C18.2 C19.2 C21.2 C22.2 D1.A D1.K D2.A D2.K IC1.4 IC1.5 IC1.6 IC1.7 IC2.5 IC2.6 IC2.7 IC3.1 IC3.2 IC3.3 IC3.8 IC4.5 IC4.6 IC4.7 IC5.1 IC5.2 IC5.3 IC5.4 IC5.8 IC6.1 IC6.2 IC6.3 IC6.4 IC6.8 R1.2 R2.2 R3.2 R4.2 R5.2 R6.2 R7.2 R8.2 R9.2 R10.2 R11.2 R12.2 R13.2 R14.2 R15.2 R16.2 R17.2 R18.2 R19.2 R20.2 R21.2 R22.2 R23.2 R24.2 R25.2 R26.2 R27.2 ZD1.A ZD1.K ZD2.A ZD2.K

## Other copper
Top Layer:
  text "BALANCED / UNBALANCED CONVERTER" at 107.061,74.922 h1.52 r270
  text "ELECTRONIC ENGINEER" at 100.711,65.024 h1.52 r270
  text "THIRUPATHI_N" at 103.886,61.595 h1.52 r270
  text "PSNA CET" at 97.282,57.531 h1.52 r270
  text "DINDIGUL" at 93.98,57.15 h1.52 r270

## Silkscreen, mask and mechanical layers (free items; w line width, h text height)
Bottom Overlay:
  text "DINDIGUL" at 93.98,46.355 h1.52 r270
  text "PSNA CET" at 97.409,46.101 h1.52 r270
  text "THIRUPATHI_N" at 103.886,44.196 h1.52 r270
  text "ELECTRONIC ENGINEER" at 100.711,37.465 h1.52 r270
  text "BALANCED / UNBALANCED CONVERTER" at 106.934,28.702 h1.52 r270